# Altium PCB АСТА.758725.047_V2.PcbDoc (part 3 of 3)
Units mm, origin at the board's own origin, x right, y up, seen from the top; angles counter-clockwise.
Board outline 310 x 80 mm, 2 copper layers (Top Layer, Top, Bottom Layer, Bottom); 261 components, 259 nets, 994 pads, 414 vias.
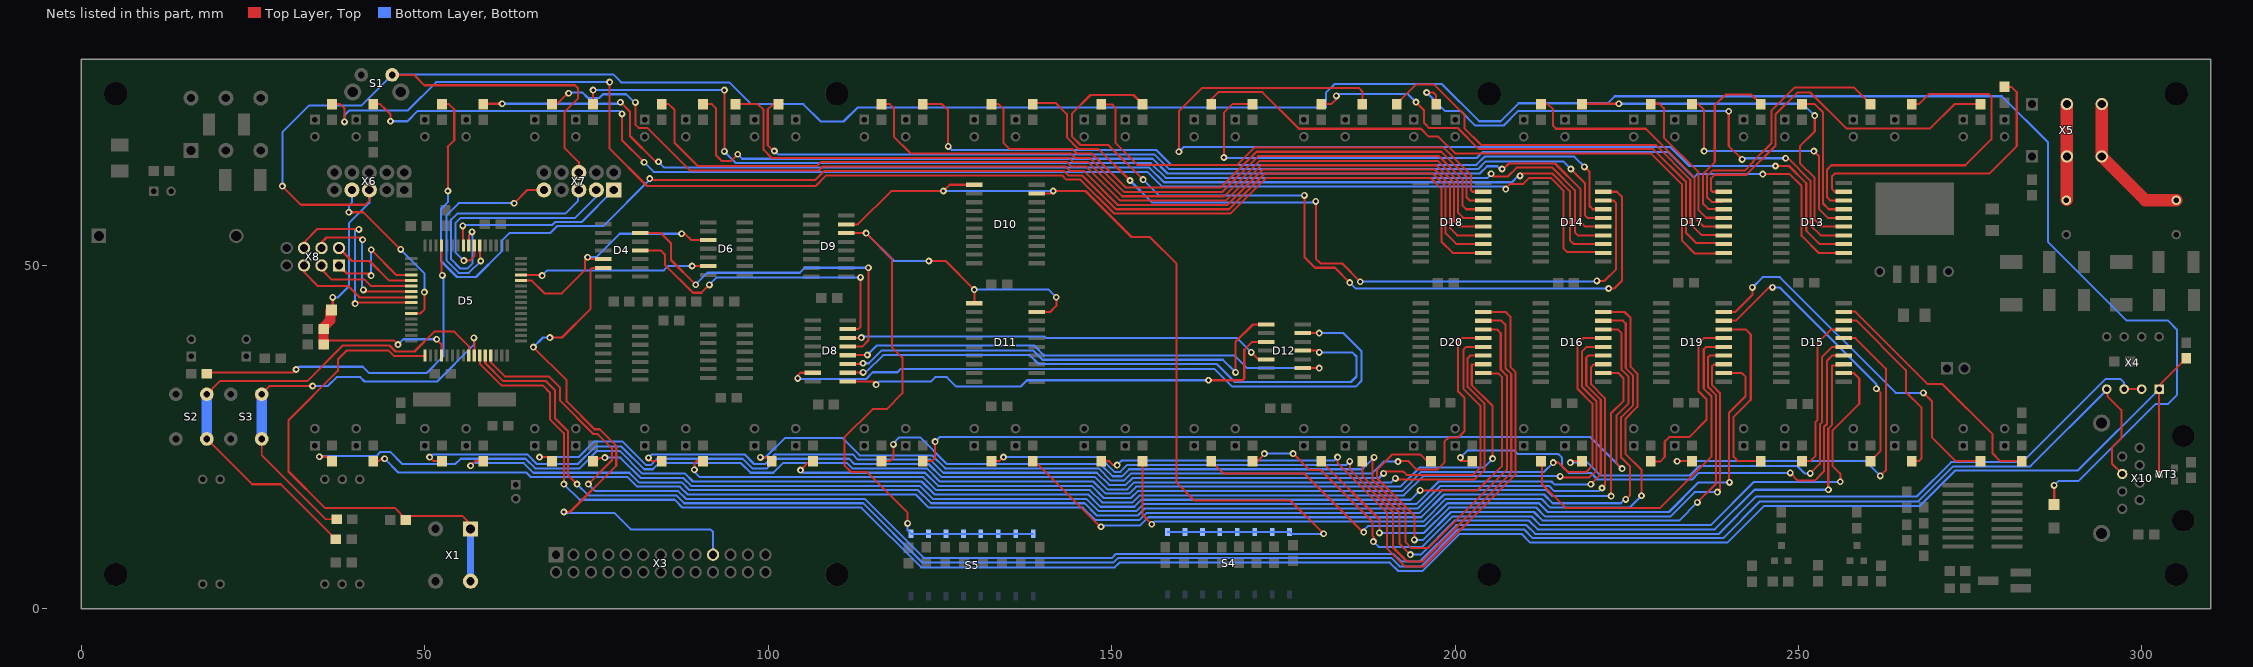
[diagram p3: the nets of this part, all layers, seen from the top]

## Via types
v1: diameter 1, hole 0.5, Top Layer, Top to Bottom Layer, Bottom, 391 vias
v2: diameter 1.016, hole 0.457, Top Layer, Top to Bottom Layer, Bottom, 12 vias
v3: diameter 1.4, hole 0.8, Top Layer, Top to Bottom Layer, Bottom, 11 vias

## Nets (pads, with @x,y where several pads share a name; then routed paths per layer and width w, separated by ;. In a path a pad name is that pad's centre, name@x,y a point inside that pad or via, vN(x,y) a via of type N, cw(c..) or ccw(c..) an arc to the next point about the centre after c; other vN are vias at no path point) (continued)
NP: D5.17 R4.2 X1.1 X1.4 | length 72.1
  Top Layer, Top w0.3: D5.17@50,36.9 49.941,36.841 45.482,36.841 44.673,37.65 38.671,37.65 37.335,36.314 37.335,34.665 30.15,27.48 30.15,20 35.45,14.7 45.6,14.7 47.236,13.064 R4.2@47.236,12.95 47.836,13.55 55.45,13.55 56.65,12.35 X1.1@56.65,11.65
  Top Layer, Top w0.508: X1.1@56.136,12.164 X1.1@56.65,11.65
  Bottom Layer, Bottom w1: X1.4@56.65,4.03 X1.1@56.65,11.65
PE2: D5.4 X8.1 | length 16.4
  Top Layer, Top w0.3: X8.1@37.5,50 38.672,48.827 41.877,48.827 v1(42.18,48.525) ; v1(42.19,52.28) 45.87,48.6 D5.4@48,48.6
  Bottom Layer, Bottom w0.3: v1(42.18,48.525) 42.18,52.27 v1(42.19,52.28)
PE3: D5.5 X8.2 | length 12.5
  Top Layer, Top w0.3: X8.2@37.5,52.54 39.39,50.65 41.95,50.65 44.8,47.8 D5.5@48,47.8
PE4: D5.6 X8.3 | length 14.6
  Top Layer, Top w0.3: X8.3@34.96,50 34.96,49.454 36.465,47.948 41.231,47.948 42.18,47 D5.6@48,47
PE5: D5.7 X8.4 | length 21.8
  Top Layer, Top w0.3: X8.4@34.96,52.54 34.96,53.36 35.68,54.08 40.62,54.08 v1(40.95,53.75) ; v1(41.05,46.45) 41.129,46.45 41.379,46.2 D5.7@48,46.2
  Bottom Layer, Bottom w0.3: v1(40.95,53.75) 40.83,53.63 40.83,46.573 40.953,46.45 v1(41.05,46.45)
PE6: D5.8 X8.5 | length 18.2
  Top Layer, Top w0.3: X8.5@32.42,50 32.42,49.023 34.433,47.01 38.869,47.01 40.55,45.33 48,45.33 D5.8@48,45.4
PE7: D5.9 X8.6 | length 29.2
  Top Layer, Top w0.3: X8.6@32.42,52.54 32.42,53.4 34.3,55.28 39.97,55.28 39.994,55.256 v1(40.402,55.256) ; v1(39.85,44.45) 40,44.6 D5.9@48,44.6
  Bottom Layer, Bottom w0.3: v1(39.85,44.45) 39.85,55.15 40.01,55.31 40.064,55.256 v1(40.402,55.256)
R: D5.61 R8.1 | length 52.6
  Top Layer, Top w0.3: R8.1@18.25,34.25 18.25,34.39 30.79,34.39 v1(31.25,34.85) ; D5.61@52.4,52.9 52.4,48.7 v1(52.55,48.55)
  Bottom Layer, Bottom w0.3: v1(31.25,34.85) 31.65,35.25 40.96,35.25 41.88,34.33 50.24,34.33 52.688,36.778 52.688,48.412 v1(52.55,48.55)
R0: D13.19 R27.1 | length 42.4
  Top Layer, Top w0.3: D13.19@256.588,60.73 255.27,60.73 254.85,61.15 254.85,62.95 255.27,63.37 277.77,63.37 281.78,67.38 281.78,75.22 281,76 R27.1@280,76
R1: D13.18 R29.1 | length 51
  Top Layer, Top w0.3: D13.18@256.588,59.46 254.64,59.46 254.18,59.92 254.18,63.98 254.79,64.59 274.31,64.59 278.08,68.36 278.08,74.62 277.75,74.95 268.95,74.95 267.5,73.5 R29.1@266.5,73.5
R2: D13.17 R31.1 | length 20.2
  Top Layer, Top w0.3: R31.1@250.5,73.5 252.36,73.5 253.57,72.29 253.57,59.03 254.41,58.19 D13.17@256.588,58.19
R3: D13.16 R33.1 | length 37
  Top Layer, Top w0.3: R33.1@234.5,73.5 235.4,73.5 236.25,72.65 v1(236.25,66.65) ; v1(252.25,66.65) 252.96,65.94 252.96,58.24 254.28,56.92 D13.16@256.588,56.92
  Bottom Layer, Bottom w0.3: v1(236.25,66.65) v1(252.25,66.65)
R4: D13.15 R35.1 | length 56.2
  Top Layer, Top w0.3: R35.1@218.5,73.5 218.55,73.55 v1(223.85,73.55) ; v1(252.37,71.81) 252.37,69.5 250.21,67.34 250.21,64.89 252.35,62.75 252.35,56.65 253.35,55.65 D13.15@256.588,55.65
  Bottom Layer, Bottom w0.3: v1(223.85,73.55) 250.63,73.55 v1(252.37,71.81)
R5: D13.14 R37.1 | length 80.9
  Top Layer, Top w0.3: v1(195.85,75.18) 196.82,75.18 197.25,74.75 R37.1@197.25,73.5 ; v1(239.85,72.45) 239.85,67.38 v1(241.79,65.44) ; v1(248.12,65.61) 248.49,65.61 251.74,62.36 251.74,55.86 253.22,54.38 D13.14@256.588,54.38
  Bottom Layer, Bottom w0.3: v1(195.85,75.18) 198.52,72.51 200.79,72.51 202.95,70.35 207.05,70.35 209.21,72.51 239.79,72.51 v1(239.85,72.45) ; v1(241.79,65.44) 241.96,65.61 v1(248.12,65.61)
R6: D13.13 R39.1 | length 143.1
  Top Layer, Top w0.3: v1(159.782,66.559) 159.782,72.452 163.18,75.85 185.95,75.85 186.55,75.25 186.55,73.55 R39.1@186.5,73.5 ; v1(246.65,64.48) 248.62,64.48 251.13,61.97 251.13,55.07 253.09,53.11 D13.13@256.588,53.11
  Bottom Layer, Bottom w0.3: v1(159.782,66.559) 160.473,67.25 231.37,67.25 234.14,64.48 v1(246.65,64.48)
R7: D13.12 R41.1 | length 112.7
  Top Layer, Top w0.3: v1(166.33,65.72) 166.33,72.25 167.58,73.5 R41.1@170.5,73.5 ; v1(244.8,63.3) 248.719,63.3 250.45,61.569 250.45,54.3 252.91,51.84 D13.12@256.588,51.84
  Bottom Layer, Bottom w0.3: v1(166.33,65.72) 166.33,65.65 203.14,65.65 204.04,66.55 231,66.55 234.45,63.1 234.75,62.8 235.25,63.3 v1(244.8,63.3)
R8: D14.19 R43.1 | length 125.5
  Top Layer, Top w0.3: R43.1@154.5,73.5 153.186,74.814 146.914,74.814 144.25,72.15 144.25,68.756 145.46,67.546 149.524,67.546 v1(154.575,62.495) ; v1(178.07,60.209) 178.07,51.18 179.6,49.65 179.618,49.668 182.515,49.668 v1(184.674,47.509) ; D14.19@221.588,60.73 223.55,60.73 224.3,59.98 224.3,47.8 223.15,46.65 v1(222.35,46.65)
  Bottom Layer, Bottom w0.3: v1(154.575,62.495) 156.861,60.209 v1(178.07,60.209) ; v1(184.674,47.509) 185.563,46.62 222.32,46.62 v1(222.35,46.65)
R9: D14.18 R45.1 | length 115.4
  Top Layer, Top w0.3: R45.1@138.5,73.5 138.65,73.65 141.85,73.65 143.47,72.03 143.47,68.647 145.177,66.94 148.098,66.94 v1(152.67,62.368) ; v1(179.721,59.32) 179.721,50.982 180.4,50.303 183.531,50.303 v1(186.198,47.636) ; v1(220.65,47.75) 221.75,47.75 223.45,49.45 223.45,59.05 223.15,59.35 223.15,59.46 D14.18@221.588,59.46
  Bottom Layer, Bottom w0.3: v1(152.67,62.368) 155.845,59.193 179.594,59.193 v1(179.721,59.32) ; v1(186.198,47.636) 220.65,47.636 v1(220.65,47.75) v1@220.536,47.636
R10: D14.17 R47.1 | length 112.4
  Top Layer, Top w0.3: R47.1@122.5,73.5 125.3,73.5 126.2,72.6 v1(126.2,67.33) ; v1(218.84,64.36) 219.575,63.625 219.575,58.665 220.05,58.19 D14.17@221.588,58.19
  Bottom Layer, Bottom w0.3: v1(126.2,67.33) 126.717,66.813 156.48,66.813 158.639,64.654 203.089,64.654 204.285,65.85 217.35,65.85 v1(218.84,64.36)
R11: D14.16 R49.1 | length 137
  Top Layer, Top w0.3: v1(100.9,66.67) 100.78,66.67 100.78,66.92 100.51,66.92 99.93,67.5 99.93,72.73 100.7,73.5 R49.1@101.5,73.5 ; v1(216.86,64.05) 218.905,62.005 218.905,57.295 219.28,56.92 D14.16@221.588,56.92
  Bottom Layer, Bottom w0.3: v1(100.9,66.67) 101.392,66.178 156.226,66.178 158.385,64.019 203.343,64.019 204.474,65.15 215.75,65.15 216.85,64.05 v1(216.86,64.05)
R12: D14.15 R51.1 | length 147.7
  Top Layer, Top w0.3: R51.1@90.5,73.5 91.8,73.5 92.38,72.92 92.38,66.09 93.27,65.2 94.55,65.2 v1(95.55,66.2) ; v1(206.85,64.05) 206.95,63.95 207.85,64.85 214.55,64.85 218.28,61.12 218.28,56.35 218.98,55.65 D14.15@221.588,55.65
  Bottom Layer, Bottom w0.3: v1(95.55,66.2) 96.207,65.543 155.972,65.543 158.131,63.384 203.597,63.384 204.663,64.45 206.15,64.45 206.55,64.05 v1(206.85,64.05)
R13: D14.14 R53.1 | length 168.4
  Top Layer, Top w0.3: R53.1@74.5,73.5 v1(74.5,75.54) ; v1(93.61,66.6) v1(93.61,75.54) ; v1(205.25,63.35) 205.25,63.25 205.55,62.95 207.68,62.95 208.97,64.24 214.16,64.24 214.42,63.98 214.43,63.98 217.45,60.96 217.45,54.85 217.95,54.35 221.558,54.35 D14.14@221.588,54.38
  Bottom Layer, Bottom w0.3: v1(74.5,75.54) v1(93.61,75.54) ; v1(93.61,66.6) 95.302,64.908 155.718,64.908 157.877,62.749 204.749,62.749 205.25,63.25 v1(205.25,63.35)
R14: D14.13 R55.1 | length 179.2
  Top Layer, Top w0.3: R55.1@58.5,73.5 58.55,73.55 v1(61.25,73.55) ; v1(78.47,73.77) 78.5,73.77 79.87,72.4 79.87,68.85 83.61,65.11 v1(84.02,65.11) ; v1(209.45,63.05) 209.45,63.28 209.54,63.37 214.18,63.37 216.715,60.835 216.715,53.685 217.25,53.15 221.548,53.15 D14.13@221.588,53.11
  Bottom Layer, Bottom w0.3: v1(61.25,73.55) 78.25,73.55 v1(78.47,73.77) ; v1(84.02,65.11) 84.88,64.25 155.487,64.25 157.623,62.114 208.284,62.114 209.22,63.05 v1(209.45,63.05)
R15: D14.12 R57.1 | length 198.5
  Top Layer, Top w0.3: R57.1@42.5,73.5 43.5,73.5 44.28,72.72 45,72 v1(45,71) ; v1(78.71,72.06) 78.71,68.256 v1(81.931,65.035) ; v1(207.37,61.12) 207.37,61.22 208.06,61.91 208.06,61.89 209.94,61.89 210.81,62.76 213.93,62.76 215.47,61.22 215.47,61.19 215.77,60.89 215.77,52.53 216.35,51.95 221.478,51.95 D14.12@221.588,51.84
  Bottom Layer, Bottom w0.3: v1(45,71) 47.48,71 48.98,72.5 78.27,72.5 v1(78.71,72.06) ; v1(81.931,65.035) 81.935,65.035 83.33,63.64 155.2,63.64 157.361,61.479 207.011,61.479 v1(207.37,61.12)
R16: D15.19 R59.1 | length 36.6
  Top Layer, Top w0.3: D15.19@256.588,43.23 256.627,43.269 256.629,43.269 258.28,43.269 268.821,32.728 270.972,32.728 278.28,25.42 278.28,22.62 279.4,21.5 R59.1@282.5,21.5
R17: D15.18 R61.1 | length 27.9
  Top Layer, Top w0.3: D15.18@256.588,41.96 256.502,41.874 256.377,41.999 256.375,41.999 258.407,41.999 265.646,34.76 265.646,31.585 267.932,29.299 267.88,21.88 267.5,21.5 R61.1@266.5,21.5
R18: D15.17 R63.1 | length 23.5
  Top Layer, Top w0.3: R63.1@250.5,21.5 251.73,21.5 252.5,22.27 252.5,27.22 252.75,27.47 252.75,38.65 254.79,40.69 D15.17@256.588,40.69
R19: D15.16 R65.1 | length 56.6
  Top Layer, Top w0.3: v1(232.32,21.5) R65.1@234.5,21.5 ; D15.16@256.588,39.42 258.29,39.42 262.73,34.98 262.73,20.18 v1(261.91,19.36)
  Bottom Layer, Bottom w0.3: v1(232.32,21.5) 259.77,21.5 v1(261.91,19.36)
R20: D15.15 R67.1 | length 59.9
  Top Layer, Top w0.3: v1(216.8,21.3) 217,21.5 R67.1@218.5,21.5 ; v1(251.72,19.72) 253.11,21.11 253.11,26.86 253.45,27.2 253.45,36.7 254.9,38.15 D15.15@256.588,38.15
  Bottom Layer, Bottom w0.3: v1(216.8,21.3) 219.3,21.3 221.15,19.45 234.2,19.45 235.55,20.8 249.8,20.8 250.88,19.72 v1(251.72,19.72)
R21: D15.14 R69.1 | length 78.5
  Top Layer, Top w0.3: v1(200.78,22.02) 200.78,21.5 R69.1@202.5,21.5 ; v1(248.8,19.8) 249.92,18.68 252.34,18.68 253.72,20.06 253.72,26.49 254.15,26.92 254.15,36.15 254.88,36.88 D15.14@256.588,36.88
  Bottom Layer, Bottom w0.3: v1(200.78,22.02) 200.77,22.02 201.78,23.03 208.67,23.03 209.15,22.55 215.05,22.55 215.55,22.05 215.55,20.8 216.55,19.8 219.79,19.8 220.745,18.845 234.545,18.845 235.5,19.8 v1(248.8,19.8)
R22: D15.13 R71.1 | length 102.7
  Top Layer, Top w0.3: R71.1@186.5,21.5 186.5,19.394 191.913,13.981 191.913,9.487 v1(193.5,7.9) ; v1(254.35,17.35) 254.35,17.22 254.33,17.2 254.33,26.24 254.85,26.76 254.85,35.45 256.428,35.45 D15.13@256.588,35.61
  Bottom Layer, Bottom w0.3: v1(193.5,7.9) 194.976,7.9 199.914,12.838 210.762,12.838 212.032,11.568 237.818,11.568 243.6,17.35 v1(254.35,17.35)
R23: D15.12 R73.1 | length 118.2
  Top Layer, Top w0.3: R73.1@170.5,21.5 171.238,21.5 172.228,22.49 v1(172.228,22.617) ; v1(176.419,22.617) 178.832,20.204 180.483,20.204 187.976,12.711 187.976,10.679 188.103,10.552 v1(188.103,9.79) ; v1(256.09,18.52) 256.09,19.68 254.94,20.83 254.94,25.94 258.85,29.85 258.85,33.55 258.06,34.34 D15.12@256.588,34.34
  Bottom Layer, Bottom w0.3: v1(172.228,22.617) v1(176.419,22.617) v1@176.546,22.617 ; v1(188.103,9.79) 188.865,9.028 195.215,9.028 199.66,13.473 211.127,13.473 212.397,12.203 237.203,12.203 243.48,18.48 256.05,18.48 v1(256.09,18.52)
R24: D16.19 R75.1 | length 116.1
  Top Layer, Top w0.3: R75.1@154.5,21.5 154.5,13.675 v1(155.845,12.33) ; D16.19@221.588,43.23 224.67,43.23 225.55,42.35 225.55,35.25 226.55,34.25 226.55,29.41 224.79,27.65 224.79,22.6 227.14,20.25 v1(227.14,16.48)
  Bottom Layer, Bottom w0.3: v1(155.845,12.33) 156.226,12.711 195.342,12.711 198.644,16.013 212.587,16.013 213.857,14.743 225.403,14.743 v1(227.14,16.48)
R25: D16.18 R77.1 | length 124.1
  Top Layer, Top w0.3: R77.1@138.5,21.5 138.801,21.5 148.351,11.95 v1(148.45,11.95) ; D16.18@221.588,41.96 224.44,41.96 224.85,41.55 224.85,35.05 225.93,33.97 225.93,29.67 224.18,27.92 224.18,22.04 225.47,20.75 225.47,16.57 v1(224.85,15.95) v1@224.82,15.92
  Bottom Layer, Bottom w0.3: v1(148.45,11.95) 148.65,12.15 154.141,12.15 155.337,13.346 195.088,13.346 198.39,16.648 212.952,16.648 214.222,15.378 224.148,15.378 224.72,15.95 v1(224.85,15.95)
R26: D16.17 R79.1 | length 130.6
  Top Layer, Top w0.3: R79.1@122.5,21.5 123.8,21.5 124.29,21.99 v1(124.29,24.36) ; D16.17@221.588,40.69 221.628,40.65 223.75,40.65 224.245,40.155 224.245,34.799 225.27,33.775 225.27,29.92 223.525,28.175 223.525,21.215 v1(224.31,20.43)
  Bottom Layer, Bottom w0.3: v1(124.29,24.36) 124.96,25.03 219.71,25.03 v1(224.31,20.43)
R27: D16.16 R81.1 | length 145.2
  Top Layer, Top w0.3: v1(104.7,20.21) 105.99,21.5 R81.1@106.5,21.5 ; v1(214.3,21.3) 214.3,21.32 215.03,21.32 216.44,19.91 219.06,19.91 219.99,20.84 219.99,29.88 217.85,32.02 217.85,38.65 218.62,39.42 D16.16@221.588,39.42
  Bottom Layer, Bottom w0.3: v1(104.7,20.21) 105.087,19.823 122.825,19.823 124.73,17.918 147.082,17.918 148.86,16.14 152.797,16.14 153.813,17.156 192.294,17.156 195.088,19.95 212.95,19.95 v1(214.3,21.3)
R28: D16.15 R83.1 | length 159.9
  Top Layer, Top w0.3: v1(89.25,20.25) 89.25,21.2 89.55,21.5 R83.1@90.5,21.5 ; v1(215.3,19.3) 215.45,19.15 219.55,19.15 220.6,20.2 220.6,30.19 218.49,32.3 218.49,37.49 219.15,38.15 D16.15@221.588,38.15
  Bottom Layer, Bottom w0.3: v1(89.25,20.25) 89.25,19.988 90.05,19.188 122.571,19.188 124.476,17.283 146.828,17.283 148.606,15.505 153.051,15.505 154.067,16.521 192.548,16.521 195.363,19.336 215.556,19.336 215.52,19.3 v1(215.3,19.3)
R29: D16.14 R85.1 | length 173.2
  Top Layer, Top w0.3: R85.1@74.5,21.5 74.972,21.5 75.454,21.982 76.182,21.982 v1(76.22,22.02) ; v1(219.77,18.14) 221.21,19.58 221.21,30.44 219.1,32.55 219.1,36.6 219.38,36.88 D16.14@221.588,36.88
  Bottom Layer, Bottom w0.3: v1(76.22,22.02) 78.464,22.02 81.423,19.061 87.646,19.061 88.789,17.918 122.063,17.918 123.968,16.013 146.32,16.013 148.098,14.235 153.559,14.235 154.575,15.251 194.326,15.251 197.628,18.553 214.047,18.553 214.46,18.14 v1(219.77,18.14)
R30: D16.13 R87.1 | length 194.2
  Top Layer, Top w0.3: v1(56.658,20.839) 57.319,21.5 R87.1@58.5,21.5 58.3,21.5 58.24,21.44 R87.1@59.12,21.44 ; v1(221.39,17.6) 221.82,18.03 221.82,30.69 219.81,32.7 219.81,35.21 220.21,35.61 D16.13@221.588,35.61
  Bottom Layer, Bottom w0.3: v1(56.658,20.839) 57.039,21.22 64.405,21.22 65.802,19.823 79.772,19.823 81.169,18.426 87.392,18.426 88.535,17.283 121.809,17.283 123.714,15.378 146.066,15.378 147.844,13.6 153.813,13.6 154.829,14.616 194.58,14.616 197.882,17.918 213.682,17.918 214.444,17.156 220.946,17.156 v1(221.39,17.6)
R31: D16.12 R89.1 | length 207.4
  Top Layer, Top w0.3: R89.1@42.5,21.5 43.314,21.5 43.664,21.85 v1(44.15,21.85) ; D16.12@221.588,34.34 221.598,34.35 223.75,34.35 224.55,33.55 224.55,30.3 222.71,28.46 v1(222.71,16.43)
  Bottom Layer, Bottom w0.3: v1(44.15,21.85) 46.15,19.85 64.788,19.85 65.45,19.188 79.518,19.188 80.915,17.791 87.138,17.791 88.281,16.648 121.462,16.648 123.367,14.743 145.812,14.743 147.59,12.965 154.067,12.965 155.083,13.981 194.834,13.981 198.136,17.283 213.317,17.283 214.17,16.43 v1(222.71,16.43)
RD: D5.45 D6.6 | length 27.9
  Top Layer, Top w0.3: D5.45@64,48.6 66.997,48.6 v1(67.072,48.525) ; v1(88.916,49.922) 91.228,49.922 D6.6@91.25,49.9
  Bottom Layer, Bottom w0.3: v1(67.072,48.525) 67.823,49.276 84.806,49.276 85.452,49.922 v1(88.916,49.922)
RD0: D9.15 D10.1 D10.19 S4.1 S4.2 S4.3 S4.4 S4.5 S4.6 S4.7 S4.8 | length 141.5
  Top Layer, Top w0.3: D9.15@111.338,55.98 113.046,55.98 117.883,60.817 125.465,60.817 v1(125.492,60.844) 126.398,61.75 D10.1@130,61.75 ; D10.19@139.088,60.48 141.13,60.48 v1(141.494,60.844) 146.193,60.844 152.887,54.15 155.55,54.15 159.45,50.25 159.45,18.377 162.068,15.759 176.038,15.759 v1(180.864,10.933)
  Bottom Layer, Bottom w0.3: v1(125.492,60.844) v1(141.494,60.844) v1@141.796,60.844 ; S4.1@158.131,11.187 S4.2@160.671,11.187 S4.3@163.211,11.187 S4.4@165.751,11.187 S4.5@168.291,11.187 S4.6@170.831,11.187 S4.7@173.371,11.187 S4.8@175.911,11.187 176.165,10.933 v1(180.864,10.933)
RD1: D9.14 D11.1 D11.19 S5.1 S5.2 S5.3 S5.4 S5.5 S5.6 S5.7 S5.8 | length 114.7
  Top Layer, Top w0.3: D9.14@111.338,54.71 v1(114.25,54.71) 117.999,50.961 117.999,38.111 119.523,36.587 119.523,31.38 117.237,29.094 115.205,29.094 111.08,24.969 111.08,20.92 112.05,19.95 114.316,19.95 120.285,13.981 v1(120.285,12.457) ; v1(123.38,50.65) 125.84,50.65 v1(130,46.49) D11.1@130,44.5 ; D11.19@139.088,43.23 141.04,43.23 141.94,44.13 v1(141.94,45.37)
  Bottom Layer, Bottom w0.3: v1(114.25,54.71) 118.31,50.65 v1(123.38,50.65) ; v1(120.285,12.457) 120.285,11.441 S5.1@120.793,10.933 S5.2@123.333,10.933 S5.3@125.873,10.933 S5.4@128.413,10.933 S5.5@130.953,10.933 S5.6@133.493,10.933 S5.7@136.033,10.933 S5.8@138.573,10.933 ; v1(130,46.49) 140.82,46.49 v1(141.94,45.37)
RS485_A: FU2.1 X5.2 X5.5 | length 14
  Top Layer, Top w1.4: FU2.1@289,59.5 FU2.1@289.08,59.58
  Top Layer, Top w1.8: FU2.1@289.08,59.58 X5.5@289.08,65.88 X5.2@289.08,73.5
RS485_B: FU1.1 X5.3 X5.6 | length 21.1
  Top Layer, Top w1.8: X5.3@294.16,73.5 X5.6@294.16,65.88 294.16,65.84 300.5,59.5 FU1.1@305,59.5
RST: C1.1 D5.20 R1.1 S1.2 VD1.2 VD5.1 X6.5 X7.6 | length 460.3
  Top Layer, Top w0.3: v1(29.25,61.55) 31.96,58.84 41.31,58.84 41.92,59.45 X6.5@41.92,61 ; C1.1@35.25,38.5 35.8,39.05 45.52,39.05 v1(46.09,38.48) ; 36.25,42 36.26,42 36.592,42.332 v1(36.592,45.35) ; S1.2@45.25,77.75 48.42,77.75 49.93,76.24 71.86,76.24 72.33,75.77 72.33,74.33 70.31,72.31 70.31,67.16 72.415,65.055 72.415,63.54 X7.6@72.42,63.54 ; v1(51.705,39.254) 52.4,38.559 D5.20@52.4,36.9 ; VD5.1@287.213,15.184 287.236,15.075 v2(287.236,17.996)
  Top Layer, Top w1.5: C1.1@35.25,38.5 R1.1@35.25,40.75 35.25,41 36.25,42 36.25,43.346 VD1.2@36.404,43.5
  Bottom Layer, Bottom w0.3: v1(29.25,61.55) 29.25,69.37 33.19,73.31 40.81,73.31 S1.2@45.25,77.75 45.313,77.813 77.432,77.813 78.575,76.67 94.323,76.67 97.498,73.495 105.118,73.495 107.658,70.955 110.96,70.955 112.992,72.987 181.191,72.987 181.191,75.146 182.461,76.416 198.082,76.416 203.498,71 206.636,71 209.258,73.622 222.212,73.622 223.228,74.638 279.616,74.638 286.347,67.907 286.347,53.403 297.75,42 303.75,42 305.143,40.607 305.143,31.204 303.746,29.807 301.968,29.807 290.792,18.631 287.871,18.631 v2(287.236,17.996) ; v1(36.592,45.35) 37.35,45.35 38.939,46.939 38.939,56.139 41.92,59.12 X6.5@41.92,61 ; v1(46.09,38.48) 46.864,39.254 v1(51.705,39.254)
RXD: D5.27 R102.2 VT3.3 X4.1 | length 296.1
  Top Layer, Top w0.254: VT3.3@302.476,19.52 VT3.3@302.511,19.604 ; X4.1@302.476,31.976 X4.1@302.5,32
  Top Layer, Top w0.3: D5.27@58,36.9 58,35.7 61.15,32.55 67.15,32.55 68.2,31.5 68.2,27.6 70.23,25.57 70.23,18.697 70.247,18.68 v1(70.247,18.172) ; VT3.3@302.476,19.52 X4.1@302.476,31.976 ; X4.1@302.476,32.093 302.476,32.491 R102.2@306.448,36.463
  Top Layer, Top w1: X4.1@302.476,32.093 X4.1@302.5,32
  Bottom Layer, Bottom w0.3: v1(70.247,18.172) 72.533,15.886 86.376,15.886 87.519,14.743 113.557,14.743 122.256,6.043 150.447,6.043 151.146,6.742 190.516,6.742 191.758,5.5 195.243,5.5 200.676,10.933 209.667,10.933 210.955,9.645 239.645,9.645 244.997,14.997 267.697,14.997 272.85,20.15 290.65,20.15 X4.1@302.5,32
SCK: D5.11 X6.7 | length 25.6
  Top Layer, Top w0.3: v1(38.95,57.75) 41.03,57.75 46.445,52.335 v1(46.498,52.335) ; D5.11@48,43 49.36,43 49.927,43.567 v1(49.927,46.112)
  Bottom Layer, Bottom w0.3: v1(38.95,57.75) 38.95,58.72 39.38,59.15 X6.7@39.38,61 ; v1(46.498,52.335) 46.498,52.282 49.927,48.853 v1(49.927,46.112)
TCK: D5.57 X7.1 | length 27.1
  Top Layer, Top w0.3: v1(55.515,55.764) 55.57,55.709 55.57,52.93 D5.57@55.6,52.9
  Bottom Layer, Bottom w0.3: v1(55.515,55.764) 55.642,55.891 68.541,55.891 68.98,56.33 72.83,56.33 X7.1@77.5,61
TDI: D5.54 X7.9 | length 31.1
  Top Layer, Top w0.3: D5.54@58,52.9 58,51.07 58.15,50.92 v1(58.15,50.65) ; v1(63.008,59.066) 64.942,61 X7.9@67.34,61
  Bottom Layer, Bottom w0.3: v1(58.15,50.65) 58.13,50.65 58.12,50.64 56.41,48.93 54.94,48.93 53.133,50.736 53.133,57.266 54.933,59.066 v1(63.008,59.066)
TDO: D5.55 X7.3 | length 32.4
  Top Layer, Top w0.3: v1(55.68,50.7) 56.55,50.7 57.2,51.35 D5.55@57.2,52.9
  Bottom Layer, Bottom w0.3: v1(55.68,50.7) 54.45,51.93 54.45,56.145 55.245,56.94 71.88,56.94 74.96,60.02 X7.3@74.96,61
TMS: D5.56 X7.5 | length 38.2
  Top Layer, Top w0.3: D5.56@56.4,52.9 56.4,54.42 v1(56.87,54.89)
  Bottom Layer, Bottom w0.3: v1(56.87,54.89) 56.96,54.8 56.96,50.34 56.16,49.54 55.19,49.54 53.84,50.89 53.84,56.653 54.737,57.55 70.43,57.55 72.32,59.44 72.32,61 X7.5@72.42,61 X7.5@72.02,61
TST1: D5.25 R2.1 S2.1 S2.2 | length 76.3
  Top Layer, Top w0.3: S2.1@18.25,24.75 24.85,18.15 29.05,18.15 R2.1@37.05,10.15 ; S2.2@18.25,31.25 20.2,33.2 20.25,33.15 32.87,33.15 38.07,38.35 44.862,38.35 45.736,37.476 48.496,37.476 51.39,40.37 54.29,40.37 56.4,38.26 D5.25@56.4,36.9
  Bottom Layer, Bottom w1.5: S2.1@18.25,24.75 S2.2@18.25,31.25
TST2: D5.26 R3.1 S3.1 S3.2 | length 62.3
  Top Layer, Top w0.254: S3.1@26.25,24.75 26.25,22.35 35.55,13.05 R3.1@37.15,13.05
  Top Layer, Top w0.3: S3.2@26.25,31.25 S3.2@26.25,31.33 ; S3.2@26.25,31.83 S3.2@26.25,31.33 ; v1(33.65,32.45) 33.69,32.45 33.71,32.43 27.35,32.43 S3.2@26.25,31.33 ; v1(57.15,39.45) 57.15,39.15 57.2,39.1 D5.26@57.2,36.9
  Bottom Layer, Bottom w0.3: v1(33.65,32.45) 35.88,32.45 37.165,33.735 40.595,33.735 41.22,33.11 51.8,33.11 57.15,38.46 v1(57.15,39.45)
  Bottom Layer, Bottom w1.5: S3.1@26.25,24.75 S3.2@26.25,31.25
TX_E: D5.29 X4.2 X4.3 | length 276.2
  Top Layer, Top w0.3: D5.29@59.6,36.9 59.6,35.9 61.65,33.85 68.05,33.85 69.65,32.25 69.65,30.35 74.55,25.45 75.19,25.45 77.232,23.408 77.232,21.601 v1(73.803,18.172) ; X4.3@297.42,32 X4.2@299.96,32
  Bottom Layer, Bottom w0.3: v1(73.803,18.172) 74.819,17.156 86.884,17.156 88.027,16.013 114.062,16.013 122.698,7.377 150.003,7.377 150.638,8.012 191.024,8.012 192.136,6.9 194.865,6.9 200.168,12.203 210.397,12.203 211.667,10.933 238.433,10.933 243.88,16.38 267.25,16.38 272.235,21.365 282.605,21.365 294.74,33.5 296.83,33.5 297.42,32.91 X4.3@297.42,32
TXD: D5.28 X4.4 X10.5 | length 282.4
  Top Layer, Top w0.254: X4.4@294.88,32 X4.4@294.983,31.897
  Top Layer, Top w0.3: D5.28@58.8,36.9 58.8,35.8 61.435,33.165 67.635,33.165 68.95,31.85 68.95,27.75 70.84,25.86 70.84,19.484 v1(72.152,18.172) ; X4.4@294.983,31.897 294.983,30.95 297.015,28.918 297.015,24.854 295.618,23.457 295.618,21.171 X10.5@297.142,19.647
  Bottom Layer, Bottom w0.3: v1(72.152,18.172) 73.803,16.521 86.63,16.521 87.773,15.378 113.822,15.378 122.458,6.742 150.257,6.742 150.892,7.377 190.77,7.377 191.947,6.2 195.054,6.2 200.422,11.568 210.032,11.568 211.302,10.298 239.048,10.298 244.4,15.65 267.45,15.65 272.56,20.76 283.77,20.76 294.88,31.87 X4.4@294.88,32
WR: D4.5 D5.44 D6.3 | length 36
  Top Layer, Top w0.3: D5.44@64,47.8 65.58,47.8 67.43,45.95 69.95,45.95 73.3,49.3 73.3,50.8 v1(73.7,51.2) ; v1@73.552,50.938 v1@73.7,51.086 ; v1@73.7,51.023 v1@73.7,51.086 ; D4.5@75.746,50.92 75.873,50.793 D4.5@76,50.92 73.98,50.92 v1(73.7,51.2) ; v1(87.392,54.621) 87.859,54.621 88.77,53.71 D6.3@91.25,53.71 ; v1@73.7,51.086 v1(73.7,51.2)
  Bottom Layer, Bottom w0.3: v1(73.7,51.2) 74.954,51.2 78.375,54.621 v1(87.392,54.621)
WR0: D4.11 D8.15 | length 45.6
  Top Layer, Top w0.3: D4.11@81.338,52.19 84.36,52.19 84.95,51.6 84.95,50.13 89.05,46.03 90.27,46.03 v1(91.42,47.18) ; D8.15@111.588,40.73 113.115,40.73 113.422,41.037 113.422,42.658 113.427,42.663 v1(113.427,48.271)
  Bottom Layer, Bottom w0.3: v1(91.42,47.18) 92.511,48.271 v1(113.427,48.271)
WR1: D8.14 D12.5 | length 63.1
  Top Layer, Top w0.3: D8.14@111.588,39.46 113.89,39.46 113.842,39.508 v1(113.554,39.508) ; v1(170.323,37.349) 171.339,36.333 D12.5@172.482,36.333
  Bottom Layer, Bottom w0.3: v1(113.554,39.508) 113.736,39.69 140.19,39.69 140.42,39.46 168.212,39.46 v1(170.323,37.349)
WR2: D4.13 D8.13 | length 52.9
  Top Layer, Top w0.3: D4.13@81.338,54.73 84.33,54.73 85.84,53.22 85.84,50.79 v1(89.44,47.19) ; D8.13@111.588,38.19 113.681,38.19 114.57,39.079 v1(114.57,49.668)
  Bottom Layer, Bottom w0.3: v1(89.44,47.19) 89.38,47.19 91.13,48.94 104.61,48.94 105.338,49.668 v1(114.57,49.668)
WR3: D8.12 D12.9 | length 73
  Top Layer, Top w0.3: D8.12@111.588,36.92 111.636,36.968 v1(114.443,36.968) ; D12.9@177.82,35.063 179.848,35.063 v1(180.229,35.063)
  Bottom Layer, Bottom w0.3: v1(114.443,36.968) 115.825,38.35 138.74,38.35 140.21,36.88 167.95,36.88 169.767,35.063 v1(180.229,35.063)
WR4: D8.11 D12.1 | length 68.6
  Top Layer, Top w0.3: D8.11@111.588,35.65 113.69,35.65 v1(113.8,35.76) ; v1(168.037,34.428) 168.037,38.873 170.577,41.413 D12.1@172.482,41.413
  Bottom Layer, Bottom w0.3: v1(113.8,35.76) 114.66,35.76 116.55,37.65 138.55,37.65 139.93,36.27 166.195,36.27 v1(168.037,34.428)
WR5: D8.10 D12.11 | length 88.2
  Top Layer, Top w0.3: D8.10@111.588,34.38 111.636,34.428 v1(113.808,34.428) ; D12.11@177.82,37.603 179.975,37.603 v1(180.229,37.349)
  Bottom Layer, Bottom w0.3: v1(113.808,34.428) 114.189,34.428 116.716,36.955 138.055,36.955 139.35,35.66 165.297,35.66 167.926,33.031 184.85,33.031 185.65,33.831 185.65,36.749 185.05,37.349 v1(180.229,37.349)
WR6: D8.9 D12.3 | length 67.2
  Top Layer, Top w0.3: D8.9@111.588,33.11 115.253,33.11 v1(115.713,32.65) ; v1(164.1,33.285) 169.053,33.285 169.307,33.539 169.307,37.73 170.45,38.873 D12.3@172.482,38.873
  Bottom Layer, Bottom w0.3: v1(115.713,32.65) 116.143,33.08 123.66,33.08 124.31,33.73 125.99,33.73 127.31,32.41 136.8,32.41 137.675,33.285 v1(164.1,33.285)
WR7: D8.7 D12.13 | length 100.9
  Top Layer, Top w0.3: v1(104.3,33.55) 104.3,34 104.68,34.38 D8.7@106.5,34.38 ; D12.13@177.82,40.143 v1(180.229,40.143)
  Bottom Layer, Bottom w0.3: v1(104.3,33.55) 104.377,33.473 114.25,33.473 115.227,34.45 118.82,34.45 119.32,34.95 164.934,34.95 167.529,32.355 185.522,32.355 186.346,33.179 186.346,37.546 183.75,40.143 v1(180.229,40.143)
WRE: D4.6 X3.19 | length 77.7
  Top Layer, Top w0.3: v1(65.802,38.111) 70.65,33.263 70.65,30.205 74.705,26.15 75.45,26.15 77.867,23.733 77.867,20.839 71.136,14.108 v1(70.247,14.108) ; v1(68.215,39.508) 69.968,39.508 74.15,43.69 74.15,49.45 74.35,49.65 D4.6@76,49.65
  Bottom Layer, Bottom w0.3: v1(65.802,38.111) 67.199,39.508 v1(68.215,39.508) ; v1(70.247,14.108) 70.374,13.981 77.55,13.981 79.963,11.568 91.583,11.568 91.964,11.187 X3.19@91.964,7.885
Y0: D17.19 R28.1 | length 54.3
  Top Layer, Top w0.3: D17.19@239.088,60.73 237.47,60.73 237.29,60.91 237.29,62.7 237.8,63.21 242.41,63.21 246.65,67.45 246.65,71.99 249.83,75.17 251.745,75.17 256.96,69.955 269.165,69.955 272.71,73.5 R28.1@276.5,73.5
Y1: D17.18 R30.1 | length 38.9
  Top Layer, Top w0.3: D17.18@239.088,59.46 238.878,59.25 237.35,59.25 236.68,59.92 236.68,63.05 237.45,63.82 242.16,63.82 243.37,65.03 243.37,65.09 246.04,67.76 246.04,72.54 249.39,75.89 258.11,75.89 R30.1@260.5,73.5
Y2: D17.17 R32.1 | length 26.3
  Top Layer, Top w0.3: D17.17@239.088,58.19 239.028,58.25 236.85,58.25 236.07,59.03 236.07,63.31 237.81,65.05 237.81,73.3 239.41,74.9 243.15,74.9 244.5,73.55 R32.1@244.5,73.5
Y3: D17.16 R34.1 | length 23.2
  Top Layer, Top w0.3: R34.1@228.5,73.5 228.55,73.55 229.75,73.55 230.4,72.9 230.4,68.62 235.46,63.56 235.46,58.05 236.56,56.95 239.058,56.95 D17.16@239.088,56.92
Y4: D17.15 R36.1 | length 38.8
  Top Layer, Top w0.3: R36.1@212.5,73.5 213.5,73.5 214.28,72.72 214.28,70.32 214.69,69.91 227.77,69.91 234.85,62.83 234.85,57.05 236.25,55.65 D17.15@239.088,55.65
Y5: D17.14 R38.1 | length 62.8
  Top Layer, Top w0.3: R38.1@191.5,73.5 191.5,73.55 194.29,76.34 196.96,76.34 201.36,71.94 201.36,69.96 203.77,67.55 229.19,67.55 234.24,62.5 234.24,56.06 235.85,54.45 239.018,54.45 D17.14@239.088,54.38
Y6: D17.13 R40.1 | length 74.1
  Top Layer, Top w0.3: R40.1@180.5,73.5 182,73.5 182.72,74.22 v1(182.72,74.69) ; v1(194.31,73.78) 195.47,72.62 195.47,70.76 196.24,69.99 200.42,69.99 203.47,66.94 228.88,66.94 233.63,62.19 233.63,54.77 235.15,53.25 238.948,53.25 D17.13@239.088,53.11
  Bottom Layer, Bottom w0.3: v1(182.72,74.69) 182.72,74.97 193.12,74.97 v1(194.31,73.78)
Y7: D17.12 R42.1 | length 90.3
  Top Layer, Top w0.3: R42.1@164.5,73.5 164.5,74.2 165.54,75.24 171.95,75.24 177.28,69.91 195.04,69.91 196.18,68.77 197.576,68.77 200.016,66.33 228.51,66.33 233.01,61.83 233.01,53.65 234.91,51.75 238.998,51.75 D17.12@239.088,51.84
Y8: D18.19 R44.1 | length 67.3
  Top Layer, Top w0.3: R44.1@148.5,73.5 148.55,73.45 150.05,73.45 150.55,72.95 150.55,67.85 153.746,64.654 168.291,64.654 170.831,67.194 198.263,67.194 202.327,63.13 202.327,60.933 202.53,60.73 D18.19@204.088,60.73
Y9: D18.18 R46.1 | length 86.3
  Top Layer, Top w0.3: R46.1@132.5,73.5 133.53,73.5 134.28,72.75 134.28,67.82 135.16,66.94 144.288,66.94 144.923,66.305 147.082,66.305 152.035,61.352 165.878,61.352 171.085,66.559 198.009,66.559 201.67,62.898 201.67,59.93 202.14,59.46 D18.18@204.088,59.46
Y10: D18.17 R48.1 | length 102.9
  Top Layer, Top w0.3: R48.1@116.5,73.5 117.7,73.5 118.28,72.92 118.28,68.76 120.735,66.305 144.034,66.305 144.669,65.67 146.828,65.67 151.781,60.717 166.132,60.717 171.339,65.924 197.666,65.924 201.06,62.53 201.06,58.75 201.62,58.19 D18.17@204.088,58.19
Y11: D18.16 R50.1 | length 126.1
  Top Layer, Top w0.3: R50.1@95.25,73.5 98.5,73.5 99.32,72.68 99.32,66.823 100.473,65.67 143.78,65.67 144.415,65.035 146.574,65.035 151.527,60.082 166.386,60.082 171.504,65.2 197.53,65.2 200.45,62.28 200.45,57.65 201.18,56.92 D18.16@204.088,56.92
Y12: D18.15 R52.1 | length 137.8
  Top Layer, Top w0.3: R52.1@84.5,73.5 85.5,73.5 86.35,72.65 86.35,67.85 89.7,64.5 107.115,64.5 107.65,65.035 143.526,65.035 144.161,64.4 146.32,64.4 151.273,59.447 166.617,59.447 171.76,64.59 197.28,64.59 199.84,62.03 199.84,56.46 200.65,55.65 D18.15@204.088,55.65
Y13: D18.14 R54.1 | length 156.2
  Top Layer, Top w0.3: R54.1@68.5,73.5 69.23,73.5 70.93,75.2 v1(70.93,75.08) ; v1@80.65,74 v1(80.65,73.75) 80.65,70.51 81.12,70.04 82.39,70.04 88.615,63.815 107.315,63.815 107.9,64.4 143.272,64.4 143.907,63.765 145.939,63.765 150.904,58.8 166.83,58.8 172.01,63.98 197.03,63.98 199.23,61.78 199.23,55.47 200.32,54.38 D18.14@204.088,54.38
  Bottom Layer, Bottom w0.3: v1(70.93,75.08) 70.93,75.2 72.93,75.2 73.75,74.38 75.39,74.38 75.94,74.93 79.32,74.93 80.5,73.75 v1(80.65,73.75)
Y14: D18.13 R56.1 | length 197.9
  Top Layer, Top w0.3: R56.1@52.5,73.5 53.5,73.5 54.28,72.72 54.28,68.23 53.34,67.29 53.356,67.274 v1(53.356,60.844) ; v1(82.75,62.65) 82.95,62.45 106.85,62.45 108.15,63.75 143.033,63.75 143.653,63.13 145.685,63.13 150.625,58.19 167.08,58.19 172.26,63.37 196.78,63.37 198.62,61.53 198.62,54.68 200.15,53.15 204.048,53.15 D18.13@204.088,53.11
  Bottom Layer, Bottom w0.3: v1(53.356,60.844) 53.356,59.216 52.355,58.215 52.355,50.655 54.69,48.32 57.45,48.32 61.25,52.12 61.25,53.66 62.34,54.75 68.26,54.75 68.28,54.77 68.29,54.77 69.24,55.72 75.96,55.72 82.75,62.51 v1(82.75,62.65)
Y15: D18.12 R58.1 | length 198.8
  Top Layer, Top w0.3: R58.1@36.5,73.5 37.67,73.5 38.3,72.87 v1(38.3,70.9) ; v1(76.91,76.7) 76.91,67.01 82.35,61.57 106.914,61.57 108.464,63.12 142.774,63.12 143.399,62.495 145.431,62.495 150.346,57.58 167.33,57.58 172.51,62.76 196.43,62.76 198.01,61.18 198.01,53.49 199.66,51.84 D18.12@204.088,51.84
  Bottom Layer, Bottom w0.3: v1(38.3,70.9) 38.3,71.86 39.03,72.59 47.55,72.59 51.66,76.7 v1(76.91,76.7)
Y16: D19.19 R60.1 | length 54.3
  Top Layer, Top w0.3: D19.19@239.088,43.23 240.82,43.23 243.3,45.71 v1(243.3,46.8) ; v1(268.186,31.458) 269.456,30.188 269.41,24.99 272.9,21.5 R60.1@276.5,21.5
  Bottom Layer, Bottom w0.3: v1(243.3,46.8) 244.8,48.3 247.3,48.3 264.142,31.458 v1(268.186,31.458)
Y17: D19.18 R62.1 | length 42.4
  Top Layer, Top w0.3: D19.18@239.088,41.96 240.88,41.96 245.97,47.05 v1(246.22,46.8) ; R62.1@260.5,21.5 260.5,21.56 261.96,23.02 261.96,31.44 v1(261.35,32.05)
  Bottom Layer, Bottom w0.3: v1(246.22,46.8) 247.3,46.8 261.35,32.75 v1(261.35,32.05)
Y18: D19.17 R64.1 | length 27.3
  Top Layer, Top w0.3: D19.17@239.088,40.69 242.31,40.69 243.05,39.95 243.05,30.45 240.55,27.95 240.55,22.15 241.2,21.5 R64.1@244.5,21.5
Y19: D19.16 R66.1 | length 27.5
  Top Layer, Top w0.3: R66.1@228.5,21.5 228.55,21.45 229.85,21.45 230.53,22.13 230.53,24.37 231.17,25.01 234.08,25.01 236.61,27.54 236.61,30.53 235.45,31.69 235.45,38.65 236.22,39.42 D19.16@239.088,39.42
Y20: D19.15 R68.1 | length 51.8
  Top Layer, Top w0.3: R68.1@212.5,21.5 212.64,21.5 212.64,18.18 216.12,14.7 229.86,14.7 237.36,22.2 237.36,30.92 236.21,32.07 236.21,37.81 236.55,38.15 D19.15@239.088,38.15
Y21: D19.14 R70.1 | length 91.6
  Top Layer, Top w0.3: v1(194.072,10.044) 194.072,13.6 188.611,19.061 188.611,20.204 190.897,22.49 194.91,22.49 196.15,21.25 196.5,21.25 R70.1@196.5,21.5 ; v1(235.28,15.5) 237.97,18.19 237.97,31.17 236.82,32.32 236.82,36.62 237.08,36.88 D19.14@239.088,36.88
  Bottom Layer, Bottom w0.3: v1(194.072,10.044) 195.342,10.044 199.406,14.108 211.492,14.108 212.762,12.838 232.618,12.838 v1(235.28,15.5)
Y22: D19.13 R72.1 | length 87.4
  Top Layer, Top w0.3: R72.1@180.5,21.5 188.992,13.008 v1(188.992,11.06) ; v1(238.2,17) 238.58,17.38 238.58,31.42 237.43,32.57 237.43,35.33 237.71,35.61 D19.13@239.088,35.61
  Bottom Layer, Bottom w0.3: v1(188.992,11.06) 195.469,11.06 199.152,14.743 211.857,14.743 213.157,13.443 231.343,13.443 234.9,17 v1(238.2,17)
Y23: D19.12 R74.1 | length 103.8
  Top Layer, Top w0.3: R74.1@164.5,21.5 166.304,19.696 178.07,19.696 186.579,11.187 v1(186.706,11.187) ; D19.12@239.088,34.34 241.76,34.34 242.31,33.79 242.31,30.99 239.91,28.59 239.91,18.46 v1(239.96,18.41)
  Bottom Layer, Bottom w0.3: v1(186.706,11.187) 186.706,11.441 187.341,12.076 195.596,12.076 198.898,15.378 212.222,15.378 213.492,14.108 231.148,14.108 235.45,18.41 v1(239.96,18.41)
Y24: D20.19 R76.1 | length 104.3
  Top Layer, Top w0.3: R76.1@148.5,21.5 149.66,21.5 150.22,20.94 v1(150.8,20.94) ; v1(182.896,22.109) 182.896,21.22 190.071,14.044 190.071,8.828 192.7,6.2 195.48,6.2 208.79,19.51 208.79,34.51 208.05,35.25 208.05,42.55 207.37,43.23 D20.19@204.088,43.23
  Bottom Layer, Bottom w0.3: v1(150.8,20.94) 151.461,21.601 182.388,21.601 v1(182.896,22.109)
Y25: D20.18 R78.1 | length 117.9
  Top Layer, Top w0.3: R78.1@132.5,21.5 133.646,21.5 v1(134.255,22.109) ; v1(184.674,21.474) 184.674,20.331 190.96,14.044 190.96,8.94 193,6.9 195.24,6.9 208.18,19.84 208.18,34.22 207.35,35.05 207.35,41.35 206.74,41.96 D20.18@204.088,41.96
  Bottom Layer, Bottom w0.3: v1(134.255,22.109) 148.225,22.109 150.384,19.95 151.273,19.95 152.289,20.966 184.166,20.966 v1(184.674,21.474)
Y26: D20.17 R80.1 | length 135.2
  Top Layer, Top w0.3: R80.1@116.5,21.5 117.65,21.5 118.23,22.08 v1(118.23,23.94) ; v1(188.22,22.05) 187.976,21.806 187.976,18.807 192.791,13.991 192.791,9.708 193.645,8.855 196.095,8.855 196.105,8.845 207.57,20.31 207.57,33.36 207.55,33.38 207.55,33.95 206.65,34.85 206.65,40.15 206.11,40.69 D20.17@204.088,40.69
  Bottom Layer, Bottom w0.3: v1(118.23,23.94) 118.23,24.118 119.092,24.98 122.113,24.98 126,21.093 148.352,21.093 150.13,19.315 151.527,19.315 152.543,20.331 186.501,20.331 v1(188.22,22.05)
Y27: D20.16 R82.1 | length 131.2
  Top Layer, Top w0.3: v1(98.85,22.05) 99.95,22.05 R82.1@100.5,21.5 ; v1(191.69,21.44) 191.8,21.55 193.15,21.55 194.42,20.28 197.43,20.28 198.45,21.3 198.45,24.32 199.09,24.96 200.45,24.96 201.37,25.88 201.37,30.72 200.43,31.66 200.43,38.83 201.05,39.45 204.058,39.45 D20.16@204.088,39.42
  Bottom Layer, Bottom w0.3: v1(98.85,22.05) 99.6,22.05 102.46,24.91 110.753,24.91 113.3,22.363 123.841,22.363 125.746,20.458 148.098,20.458 149.876,18.68 151.781,18.68 152.797,19.696 187.856,19.696 189.6,21.44 v1(191.69,21.44)
Y28: D20.15 R84.1 | length 149.2
  Top Layer, Top w0.3: v1(82.566,21.982) 83.048,21.5 R84.1@84.5,21.5 ; v1(189.6,19.73) 189.87,20 192.47,20 192.95,19.52 202.67,19.52 203.69,20.54 203.69,29.59 201.21,32.07 201.21,37.71 201.65,38.15 D20.15@204.088,38.15
  Bottom Layer, Bottom w0.3: v1(82.566,21.982) 83.074,22.49 96.536,22.49 97.933,21.093 99.584,21.093 100.981,22.49 112.284,22.49 113.046,21.728 123.587,21.728 125.492,19.823 147.844,19.823 149.622,18.045 152.035,18.045 153.051,19.061 188.931,19.061 v1(189.6,19.73)
Y29: D20.14 R86.1 | length 166.4
  Top Layer, Top w0.3: v1(66.691,22.109) 67.891,22.109 R86.1@68.5,21.5 ; v1(191.31,19.01) 191.46,18.86 202.89,18.86 204.3,20.27 204.3,29.84 201.82,32.32 201.82,36.52 202.18,36.88 D20.14@204.088,36.88
  Bottom Layer, Bottom w0.3: v1(66.691,22.109) 72.406,22.109 74.692,24.395 78.756,24.395 82.185,20.966 82.947,20.966 83.836,21.855 96.282,21.855 97.679,20.458 99.838,20.458 101.235,21.855 111.788,21.855 112.55,21.093 123.333,21.093 125.238,19.188 147.59,19.188 149.368,17.41 152.289,17.41 153.305,18.426 190.726,18.426 v1(191.31,19.01)
Y30: D20.13 R88.1 | length 182.1
  Top Layer, Top w0.3: v1(50.689,22.109) 51.298,21.5 R88.1@52.5,21.5 ; D20.13@204.088,35.61 202.48,35.61 202.43,35.56 202.43,32.57 205.46,29.54 v1(205.46,21.87)
  Bottom Layer, Bottom w0.3: v1(50.689,22.109) 51.07,22.49 64.913,22.49 66.31,21.093 72.279,21.093 74.819,23.633 78.629,23.633 81.931,20.331 83.201,20.331 84.09,21.22 96.028,21.22 97.425,19.823 100.727,19.823 102.124,21.22 111.488,21.22 112.25,20.458 123.079,20.458 124.984,18.553 147.336,18.553 149.114,16.775 152.543,16.775 153.559,17.791 192.04,17.791 194.824,20.575 204.165,20.575 v1(205.46,21.87)
Y31: D20.12 R90.1 | length 199
  Top Layer, Top w0.3: v1(34.65,22.15) 35.85,22.15 36.399,21.601 R90.1@36.5,21.5 ; v1(194.9,17.25) 203.27,17.25 206.85,20.83 206.85,33.75 206.3,34.3 204.128,34.3 D20.12@204.088,34.34
  Bottom Layer, Bottom w0.3: v1(34.65,22.15) 34.75,22.25 42.95,22.25 43.55,22.85 44.95,22.85 46.707,21.093 54.45,21.093 55.217,21.86 64.654,21.86 66.056,20.458 72.533,20.458 75.073,22.998 78.375,22.998 81.677,19.696 87.9,19.696 89.043,18.553 122.317,18.553 124.222,16.648 146.574,16.648 148.352,14.87 153.305,14.87 154.321,15.886 193.536,15.886 v1(194.9,17.25)
pads on no net: D2.9 D2.11 D5.1 D5.16 D5.18 D5.19 D5.30 D5.32 D5.33 D5.34 D5.43 D5.58 D5.59 D6.10 D6.13 D9.7 D9.9 D9.10 D9.11 D9.12 D9.13 D21.13 D21.16 X6.3 X6.4 X7.8 X10.6 X10.7 X10.8 X10.9 X10.10
copper on no net: | length 9.4
  Top Layer, Top w0.75: 8.975,74.85 ccw(c8.6,74.85) 8.975,74.85 ; 9.275,3.5 ccw(c8.9,3.5) 9.275,3.5 ; 300.775,77.4 ccw(c300.4,77.4) 300.775,77.4 ; 301.475,2.45 ccw(c301.1,2.45) 301.475,2.45

## Silkscreen, mask and mechanical layers (free items; w line width, h text height)
Top Overlay, Top Silk:
  drawing of 841 lines, arcs and shapes, not listed
  text "TST1" at 12.5,20.25 h2.82
  text "TST2" at 20.5,20.25 h2.82
  text "ПЛАТА ТО" at 210,6 h2.5
  text "ACTA.758725.047 V2" at 210,2.5 h2.4
Bottom Overlay, Bot Silk:
  region: 13.45,76.7 13.45,75.85 17.55,75.85 17.55,76.7
  region: 50.05,2.5 50.05,1.65 54.15,1.65 54.15,2.5
  region: 287.15,76.1 287.15,75.25 291.25,75.25 291.25,76.1
  region: 282.11,69.91 282.618,69.91 282.618,74.355 282.11,74.355
  region: 292.27,69.91 292.778,69.91 292.778,74.355 292.27,74.355
  region: 287.19,69.91 287.698,69.91 287.698,74.355 287.19,74.355
  region: 18.45,76.75 18.45,75.9 22.55,75.9 22.55,76.75
  region: 23.5,76.75 23.5,75.9 27.6,75.9 27.6,76.75
  region: 55.35,2.55 55.35,1.7 59.45,1.7 59.45,2.55
  region: 292.2,76.1 292.2,75.25 296.3,75.25 296.3,76.1
  region: 282.15,76.05 282.15,75.2 286.25,75.2 286.25,76.05
  lines w0.2: 24.5,78.5 27.5,78.5 ; 25.5,77.75 26.5,77.75 ; 25.9,77.1 26.1,77.1 ; 26,78.5 26,79.45 ; 65.954,11.835 67.704,10.085 69.454,11.835 ; 81.704,11.835 81.704,10.585 86.704,10.585 86.704,11.835 ; 64.204,1.835 64.204,11.835 104.204,11.835 104.204,1.835 64.204,1.835 ; 118.901,3.547 118.901,9.747 140.201,9.747 140.201,3.547 118.901,3.547 ; 156.351,3.647 156.351,9.847 177.651,9.847 177.651,3.647 156.351,3.647
  lines w0.254: 281.6,75.1 297.096,75.117 ; 281.65,64.35 297.096,64.322 297.096,74.99 ; 292.016,64.322 292.016,74.99
  lines w0.3: 64.3,18.4 65.35,18.4 ; 64.8,17.85 64.8,18.9 ; 281.65,64.35 281.65,74.95
  text "+" at 14.3,77.3 h2.82
  text "-" at 19.3,77.3 h2.82
  text "SH" at 286.3,76.3 h2.82
  text "A" at 290.8,76.3 h2.82
  text "B" at 295.8,76.3 h2.82
  text "RESET" at 58.3,75.8 h2.82
  text "24V" at 10.3,70.8 h2.82 r90
  text "JTAG" at 61.8,66.3 h2.82 r90
  text "SPI" at 31.3,57.8 h2.82
  text "NP" at 59.8,13.8 h2.82
  text "1" at 69.3,12.3 h2.12
  text "INTERFACE" at 101.8,12.3 h2.82
  text "ON" at 121,6.5 h2.12 r90
  text "ON" at 158.5,6.5 h2.12 r90
Mechanical 1, Top Assy:
  lines w0.2: 34.5,42 34.5,45 ; 279,47 283,47 ; 295,47 299,47 ; 34.5,43.5 36,45 36,42 34.5,43.5 ; 279,49 283,49 281,47 279,49 ; 295,49 299,49 297,47 295,49
Mechanical 13:
  the board outline again, w0.1

## Text inside footprints (layer, text, board x,y; h text height)
S4: Mechanical 2, Bot Assy "1" at 157.423,10.304 h2.12 r180; Mechanical 2, Bot Assy "2" at 159.923,10.304 h2.12 r180; Mechanical 2, Bot Assy "ON" at 156.597,6.504 h2.12 r180; Mechanical 2, Bot Assy "3" at 162.423,10.304 h2.12 r180; Mechanical 2, Bot Assy "5" at 167.523,10.304 h2.12 r180; Mechanical 2, Bot Assy "4" at 165.023,10.304 h2.12 r180; Mechanical 2, Bot Assy "6" at 170.123,10.204 h2.12 r180; Mechanical 2, Bot Assy "7" at 172.723,10.204 h2.12 r180; Mechanical 2, Bot Assy "8" at 175.123,10.204 h2.12 r180
S5: Mechanical 2, Bot Assy "1" at 120.085,10.05 h2.12 r180; Mechanical 2, Bot Assy "2" at 122.585,10.05 h2.12 r180; Mechanical 2, Bot Assy "ON" at 119.259,6.25 h2.12 r180; Mechanical 2, Bot Assy "3" at 125.085,10.05 h2.12 r180; Mechanical 2, Bot Assy "5" at 130.185,10.05 h2.12 r180; Mechanical 2, Bot Assy "4" at 127.685,10.05 h2.12 r180; Mechanical 2, Bot Assy "6" at 132.785,9.95 h2.12 r180; Mechanical 2, Bot Assy "7" at 135.385,9.95 h2.12 r180; Mechanical 2, Bot Assy "8" at 137.785,9.95 h2.12 r180
X6: Bottom Overlay, Bot Silk "1" at 47.3,54.8 h1.98
X7: Bottom Overlay, Bot Silk "1" at 77.8,54.8 h1.98